# Altium PCB Sensor Bar 2.0 by GAO.PcbDoc (part 2 of 3)
Units mil, origin at the board's own origin, x right, y up, seen from the top; angles counter-clockwise.
Board outline 6710 x 1765 mil, 2 copper layers (Top Layer, Bottom Layer); 247 components, 162 nets, 624 pads, 280 vias.
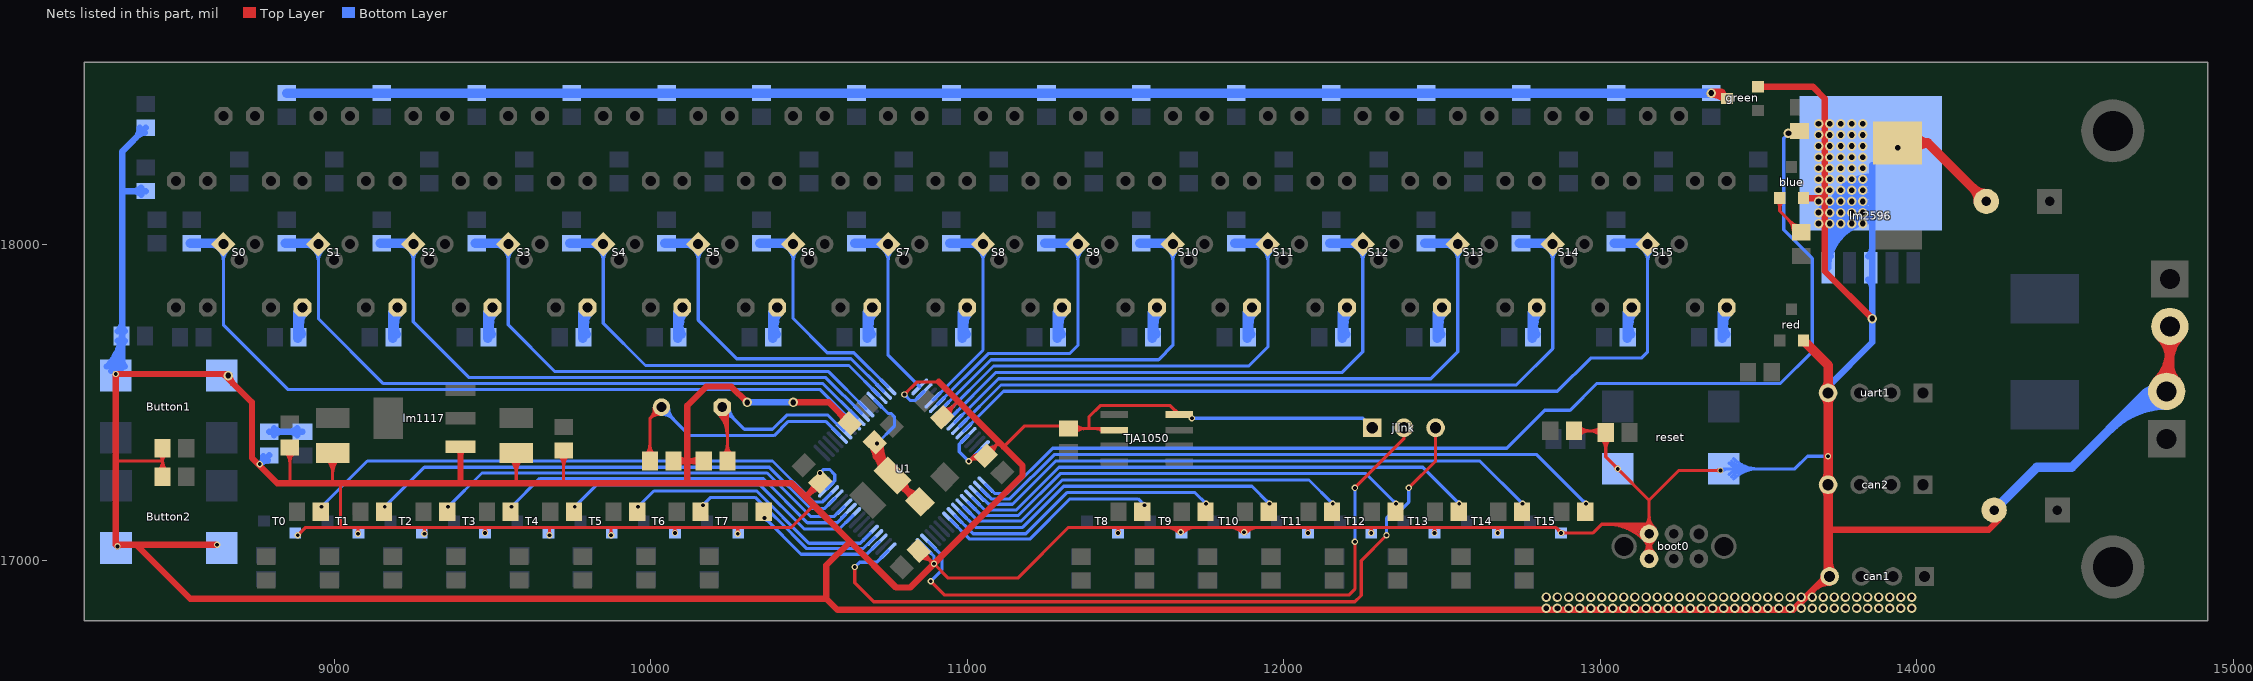
[diagram p2: the nets of this part, all layers, seen from the top]

## Via types
v1: diameter 30, hole 18, Top Layer to Bottom Layer, 141 vias
v2: diameter 20, hole 12, Top Layer to Bottom Layer, 139 vias

## Nets (pads, with @x,y where several pads share a name; then routed paths per layer and width w, separated by ;. In a path a pad name is that pad's centre, name@x,y a point inside that pad or via, vN(x,y) a via of type N, cw(c..) or ccw(c..) an arc to the next point about the centre after c; other vN are vias at no path point) (continued)
GND: blue.2 boot0.5 boot0.6 Button1.1 Button2.1 C1.2 C2.1 C3.2 C4.1 C5.1 C6.1 C7.1 C9.2 C10.2 C13.2 C14.1 C15.2 C16.1 C17.2 C18.2 C19.2 C20.2 C22.2 C23.2 can1.4 can2.4 green.2 jlink.1 lm1117.1 lm2596.0 lm2596.3 lm2596.5 power1.2 power2.2 R1.1 R2.1 R3.1 red.2 reset.1 schottky.2 T0.2 T1.2 T2.2 T3.2 T4.2 T5.2 T6.2 T7.2 T8.2 T9.2 T10.2 T11.2 T12.2 T13.2 T14.2 T15.2 TJA1050.2 TJA1050.8 U1.18 U1.28 U1.31 U1.47 U1.63 uart1.4 | length 33257.7
  Top Layer w10: 8310,17315 8457.6,17315 ; C10.2@8443.87,17284.28 ccw(c8416.37,17315) 8457.6,17315 ; C9.2@8447.13,17333.33 cw(c8436.31,17315) 8457.6,17315 ; C10.2@8457.6,17270 8457.6,17315 ; C9.2@8457.6,17360 C9.2@8457.6,17355 8457.6,17315 ; C9.2@8468.06,17333.33 ccw(c8478.88,17315) 8457.6,17315 ; C10.2@8471.33,17284.28 cw(c8498.82,17315) 8457.6,17315 ; C16.1@8845.44,17343.04 cw(c8810.29,17307.89) 8860,17307.89 cw(c8909.71,17307.89) C16.1@8874.56,17343.04 ; 8860,17250 C16.1@8860,17357.6 ; v2(8885,17080) 8910,17105 9020,17105 ; v2@8885,17085 ccw(c8885,17097.07) 8893.54,17088.54 ccw(c8902.07,17080) v2@8890,17080 ; C15.2@8976.26,17321.15 cw(c8931.03,17275.91) 8995,17275.91 cw(c9058.97,17275.91) C15.2@9013.74,17321.15 ; C15.2@8983.34,17328.22 cw(c8955.18,17300.06) 8995,17300.06 cw(c9034.82,17300.06) C15.2@9006.66,17328.22 ; 8995,17245 C15.2@8995,17339.88 ; 9020,17245 9020,17105 ; v2@9071.46,17088.54 ccw(c9062.93,17097.07) 9075,17097.07 ccw(c9087.07,17097.07) v2@9078.54,17088.54 ; v2(9075,17085) 9075,17105 ; v2@9281.46,17088.54 ccw(c9272.93,17097.07) 9285,17097.07 ccw(c9297.07,17097.07) v2@9288.54,17088.54 ; v2(9285,17085) 9285,17102.5 ; v2@9473.18,17091.13 ccw(c9464.65,17099.67) 9476.72,17099.67 ccw(c9488.79,17099.67) v2@9480.25,17091.13 ; v2(9476.72,17087.6) 9476.72,17103.28 ; C17.2@9556.26,17321.15 cw(c9511.03,17275.91) 9575,17275.91 cw(c9638.97,17275.91) C17.2@9593.74,17321.15 ; C17.2@9563.34,17328.22 cw(c9535.18,17300.06) 9575,17300.06 cw(c9614.82,17300.06) C17.2@9586.66,17328.22 ; 9575,17245 C17.2@9575,17339.88 ; v2@9676.46,17083.54 ccw(c9667.93,17092.07) 9680,17092.07 ccw(c9692.07,17092.07) v2@9683.54,17083.54 ; v2(9680,17080) 9680,17105 ; C14.1@9710.44,17333.04 cw(c9675.29,17297.89) 9725,17297.89 cw(c9774.71,17297.89) C14.1@9739.56,17333.04 ; 9725,17245 C14.1@9725,17347.6 ; v2@9871.46,17083.54 ccw(c9862.93,17092.07) 9875,17092.07 ccw(c9887.07,17092.07) v2@9878.54,17083.54 ; v2(9875,17080) 9875,17100 ; v2@10073.18,17091.13 ccw(c10064.65,17099.67) 10076.72,17099.67 ccw(c10088.79,17099.67) v2@10080.25,17091.13 ; v2(10076.72,17087.6) 10076.72,17103.28 ; v2@10271.46,17088.54 ccw(c10262.93,17097.07) 10275,17097.07 ccw(c10287.07,17097.07) v2@10278.54,17088.54 ; v2(10275,17085) 10275,17105 ; 10488.95,17201.05 10492.89,17205 ; 10510,17170 10445,17105 10275,17105 ; v2(10801.63,17525) 10841.63,17565 10910,17565 ; v2@10801.63,17530 ccw(c10801.63,17542.07) 10810.17,17533.54 ccw(c10818.7,17525) v2@10806.63,17525 ; C4.1@10846.45,17031.45 10853.55,17031.45 v2(10895,16990) ; C4.1@10849.5,17018.08 cw(c10850.5,16978.46) 10878.52,17006.48 ; C4.1@10849.75,17008.08 cw(c10851.31,16946.31) v2(10895,16990) ; C4.1@10869.82,17028.66 ccw(c10902.38,17028.66) 10879.36,17005.64 ; v2@10890,16990 ccw(c10877.93,16990) 10886.46,16998.54 ccw(c10895,17007.07) v2@10895,16995 ; v2@10890.17,16988.71 ccw(c10878.51,16985.58) 10884.54,16996.04 ccw(c10890.58,17006.49) v2@10893.71,16994.83 ; C7.1@10921.45,17453.55 10967.5,17499.61 ; C7.1@10924.23,17476.93 ccw(c10924.23,17526.64) 10959.38,17491.49 ccw(c10994.53,17456.34) C7.1@10944.82,17456.34 ; v2@11005,17319.05 ccw(c11005,17331.12) 11013.54,17322.58 ccw(c11022.07,17314.05) v2@11010,17314.05 ; v2@11006.29,17318.88 ccw(c11009.42,17330.54) 11015.45,17320.08 ccw(c11021.49,17309.63) 11009.83,17312.75 cw(c11030.04,17307.34) 11019.58,17325.46 ; v2@11009.95,17314.78 cw(c11016.89,17315.8) 11013.38,17321.88 ; 11012.08,17321.13 cw(c11030.2,17303.01) C6.1@11048.29,17321.16 ; 11019.17,17328.21 cw(c11037.27,17310.11) C6.1@11055.35,17328.24 ; C6.1@11041.23,17314.08 ccw(c11023.13,17295.92) v2(11005,17314.05) 11022.4,17331.45 C6.1@11058.55,17331.45 ; C6.1@11058.55,17333.55 C6.1@11058.55,17331.45 ; C6.1@11061.34,17354.82 ccw(c11061.34,17404.53) 11096.49,17369.38 ccw(c11131.64,17334.23) C6.1@11081.93,17334.23 ; 11100,17375 11100,17372.89 C6.1@11058.55,17331.45 ; 11115,17360 11180,17425 11290,17425 ccw(c11290,17437.05) C2.1@11299.62,17429.8 ; C2.1@11320,17417.4 11385,17417.4 ; C2.1@11338.5,17402.84 cw(c11373.65,17367.69) 11373.65,17417.4 cw(c11373.65,17467.11) C2.1@11338.5,17431.96 ; 11405.69,17417.4 cw(c11405.69,17384.89) TJA1050.2@11428.68,17407.88 ; TJA1050.2@11459.87,17417.4 11385,17417.4 ; v2@11473.18,17091.13 ccw(c11464.65,17099.67) 11476.72,17099.67 ccw(c11488.79,17099.67) v2@11480.25,17091.13 ; v2(11476.72,17087.6) 11476.72,17103.28 ; 11626.72,17105 cw(c11626.72,17041.72) v2@11671.46,17086.46 ; 11650.86,17105 cw(c11650.86,17065.86) 11678.54,17093.54 cw(c11687.07,17102.07) 11675,17102.07 cw(c11662.93,17102.07) 11671.46,17093.54 cw(c11699.14,17065.86) 11699.14,17105 ; TJA1050.8@11670,17462 11642,17490 11420,17490 11385,17455 11385,17417.4 ; v2(11675,17090) 11675,17105 ; v2@11678.54,17086.46 cw(c11723.28,17041.72) 11723.28,17105 ; 11826.72,17105 cw(c11826.72,17041.72) v2@11871.46,17086.46 ; 11850.86,17105 cw(c11850.86,17065.86) 11878.54,17093.54 cw(c11887.07,17102.07) 11875,17102.07 cw(c11862.93,17102.07) 11871.46,17093.54 cw(c11899.14,17065.86) 11899.14,17105 ; v2(11875,17090) 11875,17105 ; v2@11878.54,17086.46 cw(c11923.28,17041.72) 11923.28,17105 ; v2@12073.18,17091.13 ccw(c12064.65,17099.67) 12076.72,17099.67 ccw(c12088.79,17099.67) v2@12080.25,17091.13 ; v2(12076.72,17087.6) 12076.72,17101.72 ; v2@12273.18,17091.13 ccw(c12264.65,17099.67) 12276.72,17099.67 ccw(c12288.79,17099.67) v2@12280.25,17091.13 ; v2(12276.72,17087.6) 12276.72,17101.72 ; v2@12473.18,17091.13 ccw(c12464.65,17099.67) 12476.72,17099.67 ccw(c12488.79,17099.67) v2@12480.25,17091.13 ; v2(12476.72,17087.6) 12476.72,17103.28 ; v2@12673.18,17091.13 ccw(c12664.65,17099.67) 12676.72,17099.67 ccw(c12688.79,17099.67) v2@12680.25,17091.13 ; v2(12676.72,17087.6) 12676.72,17103.28 ; v2@12871.72,17087.6 ccw(c12859.65,17087.6) 12868.18,17096.13 ccw(c12876.72,17104.67) v2@12876.72,17092.6 ; v2@12880.25,17084.06 cw(c12888.79,17075.53) 12888.79,17087.6 cw(c12888.79,17099.67) v2@12880.25,17091.13 ; R3.1@12917.4,17410 C13.2@13012.6,17410 ; R3.1@12931.96,17395.44 cw(c12967.11,17360.29) 12967.11,17410 cw(c12967.11,17459.71) R3.1@12931.96,17424.56 ; 12965.32,17410 cw(c12965.32,17356.66) C13.2@13003.04,17394.38 ; 12970.45,17410 ccw(c12970.45,17456.08) C13.2@13003.04,17423.5 ; 12989.46,17410 cw(c12989.46,17380.8) C13.2@13010.11,17401.45 ; C13.2@13003.04,17386.5 cw(c12967.89,17351.35) 13017.6,17351.35 cw(c13067.31,17351.35) C13.2@13032.16,17386.5 ; C13.2@13017.6,17405 13017.6,17327.76 v2(13055.35,17290) 13154.41,17190.95 ; 13021.25,17115 cw(c13021.25,16951.21) 13137.07,17067.03 cw(c13095.19,17025.16) 13154.41,17025.16 cw(c13213.62,17025.16) boot0.6@13171.75,17067.03 ; 13045.39,17115 cw(c13045.39,16975.35) 13144.14,17074.1 cw(c13119.34,17049.3) 13154.41,17049.3 cw(c13189.48,17049.3) boot0.6@13164.68,17074.1 ; v2@13050.35,17290 ccw(c13038.28,17290) 13046.82,17298.54 ccw(c13055.35,17307.07) v2@13055.35,17295 ; v2@13055.35,17285 cw(c13055.35,17272.93) 13063.89,17281.46 cw(c13072.43,17290) v2@13060.35,17290 ; 13069.53,17115 cw(c13069.53,16999.49) boot0.6@13151.21,17081.17 ; 13093.67,17115 cw(c13093.67,17023.63) boot0.6@13158.28,17088.24 ; 13117.82,17115 cw(c13117.82,17047.78) boot0.6@13165.35,17095.31 ; boot0.5@13137.07,17022.97 ccw(c13095.19,17064.84) 13154.41,17064.84 ccw(c13213.62,17064.84) boot0.5@13171.75,17022.97 ; boot0.6@13137.07,17101.71 ccw(c13095.19,17143.58) 13154.41,17143.58 ccw(c13213.62,17143.58) boot0.6@13171.75,17101.71 ; boot0.6@13141.03,17063.81 cw(c13131.03,17048.44) 13148.74,17043.69 cw(c13175.65,17036.48) boot0.6@13164.35,17061.95 ; 13141.96,17115 cw(c13141.96,17071.92) boot0.6@13172.42,17102.38 ; boot0.5@13144.14,17015.9 ccw(c13119.34,17040.7) 13154.41,17040.7 ccw(c13189.48,17040.7) boot0.5@13164.68,17015.9 ; boot0.6@13144.14,17094.64 ccw(c13119.34,17119.44) 13154.41,17119.44 ccw(c13189.48,17119.44) boot0.6@13164.68,17094.64 ; boot0.6@13144.46,17061.95 cw(c13133.17,17036.48) 13160.08,17043.69 cw(c13177.79,17048.44) boot0.6@13167.79,17063.81 ; 13150,17115 13005,17115 12977.6,17087.6 v2(12876.72,17087.6) 12859.31,17105 11875,17105 ; boot0.5@13154.41,17005.63 boot0.6@13154.41,17084.37 13154.41,17190.95 ; v2@13376.46,17281.46 ccw(c13367.93,17272.93) 13367.93,17285 ccw(c13367.93,17297.07) v2@13376.46,17288.54 ; v2(13380,17285) 13248.46,17285 13154.41,17190.95 ; 9020,17105 9075,17105 ; 9075,17105 9680,17105 ; 9680,17105 10275,17105 ; v2(10895,16990) 10940,16945 11160,16945 11320,17105 11675,17105 ; 11675,17105 11875,17105
  Top Layer w20: 8310,17057.07 ccw(c8327.07,17057.07) v2(8315,17045) cw(c8327.07,17032.93) 8327.07,17050 ; v2@8625,17050 8375,17050 ; 8640.86,17590 cw(c8640.86,17560.86) v1@8661.46,17581.46 ; v1@8660.38,17583.08 ccw(c8650,17578.75) 8650,17590 ; v1@8670,17585 ccw(c8706.21,17585) 8680.61,17559.39 ; lm1117.1@9392.32,17352.6 cw(c9375.79,17336.07) 9399.17,17336.07 cw(c9422.55,17336.07) lm1117.1@9406.02,17352.6 ; lm1117.1@9399.17,17359.45 9399.17,17245 ; C1.2@10072.4,17315 10115,17315 ; C1.2@10083.43,17303.98 cw(c10110.04,17277.36) 10110.04,17315 cw(c10110.04,17352.64) C1.2@10083.43,17326.02 ; C3.2@10156.57,17303.98 ccw(c10129.96,17277.36) 10129.96,17315 ccw(c10129.96,17352.64) C3.2@10156.57,17326.02 ; C3.2@10167.6,17315 10115,17315 ; v1(10305,17500) 10255,17550 10175,17550 10115,17490 10115,17315 ; v1@10445,17500 v1(10450,17500) 10562.11,17500 R2.1@10628.55,17433.55 ; 10492.89,17205 C5.1@10536.45,17248.55 ; C5.1@10518.07,17245.77 cw(c10480.43,17245.77) 10507.05,17219.15 cw(c10533.66,17192.54) C5.1@10533.66,17230.18 ; R2.1@10610.18,17436.34 ccw(c10572.54,17436.34) 10599.15,17462.95 ccw(c10625.77,17489.57) R2.1@10625.77,17451.93 ; 10910,17565 11100,17375 11115,17360 11175,17300 11175,17270 v2(10895,16990) 10820,16915 10775,16915 10630,17060 ; green.2@13499.21,18497.4 13672.6,18497.4 13710,18460 13710,18310 13710,18240 13710,18145 ; green.2@13505.65,18491.95 cw(c13518.83,18478.77) 13518.83,18497.4 cw(c13518.83,18516.03) green.2@13505.65,18502.86 ; blue.2@13643.19,18145 13710,18145 ; blue.2@13647.86,18139.35 cw(c13661.51,18125.7) 13661.51,18145 ; blue.2@13647.86,18150.26 ccw(c13660.56,18162.96) 13660.56,18145 ; 13674.59,16909.59 cw(c13725,16859.19) can1.4@13725,16930.47 ; 13698.74,16933.74 ccw(c13682.47,16950) can1.4@13705.47,16950 ; can1.4@13720,16955 13625,16860 13610,16845 13600,16845 13390,16845 13285,16845 10590,16845 10555,16880 ; 13720,17097.5 14227.5,17097.5 C19.2@14260,17130 ; v1(13860,17765) 13710,17915 13710,18145 ; 8375,17050 8545,16880 10555,16880 ; 8375,17050 8310,17050 8310,17315 v2(8310,17590) 8650,17590 ; 8650,17590 8740,17500 8740,17325 8820,17245 8995,17245 9020,17245 9399.17,17245 ; 9399.17,17245 9575,17245 9725,17245 10115,17245 ; 10115,17245 10115,17315 ; 10115,17245 10445,17245 10488.95,17201.05 10630,17060 ; 10555,16880 10555,16985 10630,17060
  Top Layer w30: red.2@13642.4,17695.79 13720,17618.19 uart1.4@13720,17530 can2.4@13720,17240 13720,17097.5 can1.4@13720,16955 ; can2.4@13709.73,17229.73 cw(c13684.93,17204.93) 13720,17204.93 cw(c13755.07,17204.93) can2.4@13730.27,17229.73 ; can2.4@13709.73,17250.27 ccw(c13684.93,17275.07) 13720,17275.07 ccw(c13755.07,17275.07) can2.4@13730.27,17250.27 ; uart1.4@13709.73,17519.73 cw(c13684.93,17494.93) 13720,17494.93 cw(c13755.07,17494.93) uart1.4@13730.27,17519.73 ; uart1.4@13709.73,17540.27 ccw(c13684.93,17565.07) 13720,17565.07 ccw(c13755.07,17565.07) uart1.4@13730.27,17540.27 ; 13720,16997.14 ccw(c13772.14,16997.14) can1.4@13735.27,16960.27 ; v1(13940,18305) cw(c13976.21,18268.79) schottky.2@13976.21,18320 ; schottky.2@13940,18320 14035,18320 ; schottky.2@13996.95,18296.5 cw(c14035,18277.45) 14035,18320 ; schottky.2@13996.95,18343.5 ccw(c14035,18362.55) 14035,18320 ; C18.2@14195,18135 ccw(c14134.64,18135) 14177.32,18177.68 ccw(c14220,18220.36) C18.2@14220,18160 ; C18.2@14220,18135 14035,18320 ; power2.2@14758.85,17566.15 ccw(c14659.5,17665.5) 14800,17665.5 ; power1.2@14768.85,17708.85 cw(c14693.64,17633.64) 14800,17633.64 cw(c14906.36,17633.64) power1.2@14831.15,17708.85 ; power2.2@14800,17530 power1.2@14800,17740 ; 14800,17617.22 ccw(c14872.22,17617.22) power2.2@14821.15,17566.15
  Bottom Layer w10: v2(10535,17276.61) 10546.76,17288.37 10565,17288.37 10581.57,17271.8 10581.57,17252.52 U1.63@10555.02,17225.97 ; v2@10535,17281.61 ccw(c10535,17293.68) 10543.54,17285.15 ccw(c10552.07,17276.61) v2@10540,17276.61 ; v2@10801.63,17520 cw(c10801.63,17507.93) 10810.17,17516.46 cw(c10818.7,17525) v2@10806.63,17525 ; v2(10801.63,17525) 10821.07,17505.56 10834.6,17505.56 U1.18@10864.03,17534.98 ; U1.47@10864.03,17045.02 10895,17014.05 v2(10895,16990) ; v2@10891.46,16993.54 ccw(c10882.93,17002.07) 10895,17002.07 ccw(c10907.07,17002.07) v2@10898.54,16993.54 ; v2@11000,17314.05 ccw(c10987.93,17314.05) 10996.46,17322.58 ccw(c11005,17331.12) 11005,17319.05 ccw(c11005,17331.12) 11013.54,17322.58 ccw(c11022.07,17314.05) v2@11010,17314.05 ; U1.28@11003.22,17395.79 10975,17367.56 10975,17344.05 v2(11005,17314.05) U1.31@11044.98,17354.03 ; v2(11710,17450) 12250,17450 jlink.1@12280,17420 ; reset.1@13383.54,17281.46 cw(c13404.14,17260.86) reset.1@13404.14,17290 ; reset.1@13390,17290 13615,17290 13655,17330 v2(13720,17330) ; reset.1@13407.68,17272.32 cw(c13450.36,17229.64) 13450.36,17290 cw(c13450.36,17350.36) reset.1@13407.68,17307.68 ; reset.1@13414.75,17265.25 cw(c13474.5,17205.5) 13474.5,17290 cw(c13474.5,17374.5) reset.1@13414.75,17314.75 ; reset.1@13421.82,17258.18 cw(c13498.64,17181.36) 13498.64,17290 cw(c13498.64,17398.64) reset.1@13421.82,17321.82 ; v2@13716.46,17326.46 ccw(c13707.93,17317.93) 13707.93,17330 ccw(c13707.93,17342.07) v2@13716.46,17333.54
  Bottom Layer w20: Button1.1@8281.72,17613.28 ccw(c8165.15,17729.85) C23.2@8330,17729.85 ; Button1.1@8295.86,17599.14 ccw(c8213.43,17681.57) C23.2@8330,17681.57 ; Button1.1@8310,17585 ccw(c8261.72,17633.28) 8330,17633.28 ccw(c8358.28,17633.28) Button1.1@8338.28,17613.28 ; v2(8310,17590) 8330,17610 8330,18292.6 C20.2@8405,18367.6 ; C23.2@8316.57,17695.04 cw(c8284.16,17662.63) 8330,17662.63 ; C23.2@8316.57,17724.96 ccw(c8284.16,17757.37) 8330,17757.37 ; 8330,17674.22 cw(c8359.44,17674.22) C23.2@8338.62,17695.04 ; 8330,17745.78 ccw(c8359.44,17745.78) C23.2@8338.62,17724.96 ; 8332.6,18167.6 C22.2@8405,18167.6 ; 8371.66,18334.26 ccw(c8338.33,18367.6) C20.2@8385.47,18367.6 ; C20.2@8381.17,18343.77 cw(c8401.06,18323.87) C20.2@8401.06,18352.01 ; C22.2@8390.04,18156.57 ccw(c8363.42,18129.96) 8363.42,18167.6 ccw(c8363.42,18205.24) C22.2@8390.04,18178.62 ; v2(8765,17305) v2@8767.4,17305 ; R1.1@8771.17,17308.77 cw(c8791.06,17288.87) R1.1@8791.06,17317.01 ; R1.1@8775.65,17330.22 cw(c8746.65,17325.75) v2@8767.4,17305 ; R1.1@8795,17332.6 v2@8767.4,17305 ; v1(10305,17500) v1(10450,17500) ; lm2596.0@13699.31,18111.81 cw(c13646.95,18059.45) lm2596.0@13721,18059.45 ; lm2596.5@13713.22,17961.78 ccw(c13694.44,17980.56) 13721,17980.56 ccw(c13747.56,17980.56) lm2596.5@13728.78,17961.78 ; uart1.4@13720,17550 13860,17690 v1(13860,17765) lm2596.0@13860,18250 ; lm2596.5@13721,17925 lm2596.0@13721,18121 ; lm2596.5@13721,17925.06 cw(c13869.54,17925.06) lm2596.0@13857.41,18073.11 ; lm2596.5@13721,17946.77 cw(c13867.77,17946.77) lm2596.0@13855.78,18093.04 ; lm2596.5@13721,17968.47 cw(c13865.99,17968.47) lm2596.0@13854.14,18112.98 ; 13721,17990.18 cw(c13864.21,17990.18) lm2596.0@13852.51,18132.91 ; 13721,18011.89 cw(c13862.43,18011.89) lm2596.0@13850.87,18152.84 ; 13721,18033.59 cw(c13860.65,18033.59) lm2596.0@13849.24,18172.78 ; lm2596.0@13721,18055.3 cw(c13858.87,18055.3) lm2596.0@13847.61,18192.71 ; lm2596.0@13721,18077.01 cw(c13857.09,18077.01) lm2596.0@13845.97,18212.64 ; lm2596.3@13847.22,17888.22 cw(c13816.37,17857.37) 13860,17857.37 ; lm2596.3@13847.22,17961.78 ccw(c13816.37,17992.63) 13860,17992.63
  Bottom Layer w30: C19.2@14245,17160 14380,17295 14490,17295 14725,17530 ; 14612.37,17417.37 cw(c14790,17239.73) power2.2@14790,17490.94 ; 14663.58,17468.58 cw(c14790,17342.16) power2.2@14790,17520.94 ; 14714.79,17519.79 cw(c14790,17444.59) power2.2@14790,17550.94 ; power2.2@14747.63,17547.08 cw(c14725,17553.53) 14725,17530 ; power2.2@14751.1,17514.32 ccw(c14725,17500.44) 14725,17530 ; power2.2@14800,17530 14725,17530
  other v1: 12830,16850 12865,16850 12900,16850 12935,16850 12970,16850 13005,16850 13040,16850 13075,16850 13110,16850 13145,16850 13180,16850 13215,16850 13250,16850 13285,16850 13320,16850 13355,16850 13390,16850 13425,16850 13460,16850 13495,16850 13530,16850 13565,16850 13600,16850 13635,16850 13670,16850 13705,16850 13740,16850 13775,16850 13810,16850 13845,16850 13880,16850 13915,16850 13950,16850 13985,16850 12830,16885 12865,16885 12900,16885 12935,16885 12970,16885 13005,16885 13040,16885 13075,16885 13110,16885 13145,16885 13180,16885 13215,16885 13250,16885 13285,16885 13320,16885 13355,16885 13390,16885 13425,16885 13460,16885 13495,16885 13530,16885 13565,16885 13600,16885 13635,16885 13670,16885 13705,16885 13740,16885 13775,16885 13810,16885 13845,16885 13880,16885 13915,16885 13950,16885 13985,16885 8665,17585 13690,18065 13725,18065 13760,18065 13795,18065 13830,18065 13690,18100 13725,18100 13760,18100 13795,18100 13830,18100 13690,18135 13725,18135 13760,18135 13795,18135 13830,18135 13690,18170 13725,18170 13760,18170 13795,18170 13830,18170 13690,18205 13725,18205 13760,18205 13795,18205 13830,18205 13690,18240 13725,18240 13760,18240 13795,18240 13830,18240 13690,18275 13725,18275 13760,18275 13795,18275 13830,18275 13690,18310 13725,18310 13760,18310 13795,18310 13830,18310 13690,18345 13725,18345 13760,18345 13795,18345 13830,18345 13690,18380 13725,18380 13760,18380 13795,18380 13830,18380
  other v2: 8630,17050
GREEN: R36.1 U1.33 | length 3541.7
  Bottom Layer w10: U1.33@11058.9,17239.89 11086.79,17212 11127,17212 11270,17355 12705,17355 12825,17475 12905,17475 12990,17560 13570,17560 13670,17660 13670,17955 13580,18045 13580,18335 v1(13595,18350)
GREENGND: green.3 R20.1 R21.1 R22.1 R23.1 R24.1 R25.1 R26.1 R27.1 R29.1 R30.1 R31.1 R32.1 R33.1 R34.1 R35.1 R37.1 | length 4584.8
  Top Layer w30: v1(13350.79,18477.4) green.3@13383.38,18477.4 ; v1@13351.23,18477.4 cw(c13351.23,18411.42) green.3@13397.88,18458.08
  Bottom Layer w30: R37.1@8850.39,18477.4 R29.1@9150.39,18477.4 R30.1@9450.39,18477.4 R31.1@9750.39,18477.4 R32.1@10050.39,18477.4 R33.1@10350.39,18477.4 R34.1@10650.39,18477.4 R35.1@10950.39,18477.4 R20.1@11250.39,18477.4 R21.1@11550.39,18477.4 R22.1@11850.39,18477.4 R23.1@12150.39,18477.4 R24.1@12450.39,18477.4 v1(13350.79,18477.4)
IN0: R56.2 S0.1 U1.8 | length 2632.2
  Bottom Layer w10: S0.1@8634.05,17984.05 cw(c8595.54,17945.54) 8650,17945.54 cw(c8704.46,17945.54) S0.1@8665.95,17984.05 ; S0.1@8641.12,17991.12 cw(c8619.68,17969.68) 8650,17969.68 cw(c8680.32,17969.68) S0.1@8658.88,17991.12 ; S0.1@8650,18000 8650,17745 8854.46,17540.54 10535.54,17540.54 U1.8@10638.53,17437.55
  Bottom Layer w30: R56.2@8545,18002.6 R56.2@8550,18002.6 S0.1@8642.4,18002.6 ; 8613.41,18002.6 cw(c8613.41,17963.41) S0.1@8641.12,17991.12
IN1: R57.2 S1.1 U1.9 | length 2328.7
  Bottom Layer w10: S1.1@8934.05,17984.05 cw(c8895.54,17945.54) 8950,17945.54 cw(c9004.46,17945.54) S1.1@8965.95,17984.05 ; S1.1@8941.12,17991.12 cw(c8919.68,17969.68) 8950,17969.68 cw(c8980.32,17969.68) S1.1@8958.88,17991.12 ; S1.1@8950,18000 8950,17765 9155.54,17559.46 10544.46,17559.46 U1.9@10652.45,17451.47
  Bottom Layer w30: R57.2@8845,18002.6 R57.2@8850,18002.6 S1.1@8942.4,18002.6 ; 8913.41,18002.6 cw(c8913.41,17963.41) S1.1@8941.12,17991.12
IN2: R58.2 S2.1 U1.10 | length 2042.7
  Bottom Layer w10: S2.1@9234.05,17984.05 cw(c9195.54,17945.54) 9250,17945.54 cw(c9304.46,17945.54) S2.1@9265.95,17984.05 ; S2.1@9241.12,17991.12 cw(c9219.68,17969.68) 9250,17969.68 cw(c9280.32,17969.68) S2.1@9258.88,17991.12 ; S2.1@9250,18000 9250,17755 9426.62,17578.38 10553.38,17578.38 U1.10@10666.37,17465.38
  Bottom Layer w30: R58.2@9145,18002.6 R58.2@9150,18002.6 S2.1@9242.4,18002.6 ; 9213.41,18002.6 cw(c9213.41,17963.41) S2.1@9241.12,17991.12
IN3: R59.2 S3.1 U1.11 | length 1756.7
  Bottom Layer w10: S3.1@9534.05,17984.05 cw(c9495.54,17945.54) 9550,17945.54 cw(c9604.46,17945.54) S3.1@9565.95,17984.05 ; S3.1@9541.12,17991.12 cw(c9519.68,17969.68) 9550,17969.68 cw(c9580.32,17969.68) S3.1@9558.88,17991.12 ; S3.1@9550,18000 9550,17745 9697.7,17597.3 10562.3,17597.3 U1.11@10680.29,17479.3
  Bottom Layer w30: R59.2@9445,18002.6 R59.2@9450,18002.6 S3.1@9542.4,18002.6 ; 9513.41,18002.6 cw(c9513.41,17963.41) S3.1@9541.12,17991.12
IN4: R60.2 S4.1 U1.14 | length 1478.2
  Bottom Layer w10: S4.1@9834.05,17984.05 cw(c9795.54,17945.54) 9850,17945.54 cw(c9904.46,17945.54) S4.1@9865.95,17984.05 ; S4.1@9841.12,17991.12 cw(c9819.68,17969.68) 9850,17969.68 cw(c9880.32,17969.68) S4.1@9858.88,17991.12 ; S4.1@9850,18000 9850,17750 9983.44,17616.56 10626.56,17616.56 U1.14@10722.05,17521.06
  Bottom Layer w30: R60.2@9745,18002.6 R60.2@9750,18002.6 S4.1@9842.4,18002.6 ; 9813.41,18002.6 cw(c9813.41,17963.41) S4.1@9841.12,17991.12
IN5: R61.2 S5.1 U1.15 | length 1180.5
  Bottom Layer w10: S5.1@10134.05,17984.05 cw(c10095.54,17945.54) 10150,17945.54 cw(c10204.46,17945.54) S5.1@10165.95,17984.05 ; S5.1@10141.12,17991.12 cw(c10119.68,17969.68) 10150,17969.68 cw(c10180.32,17969.68) S5.1@10158.88,17991.12 ; S5.1@10150,18000 10150,17760 10272.02,17637.98 10632.98,17637.98 U1.15@10735.97,17534.98
  Bottom Layer w30: R61.2@10045,18002.6 R61.2@10050,18002.6 S5.1@10142.4,18002.6 ; 10113.41,18002.6 cw(c10113.41,17963.41) S5.1@10141.12,17991.12
IN6: R62.2 S6.1 U1.16 | length 885.8
  Bottom Layer w10: S6.1@10434.05,17984.05 cw(c10395.54,17945.54) 10450,17945.54 cw(c10504.46,17945.54) S6.1@10465.95,17984.05 ; S6.1@10441.12,17991.12 cw(c10419.68,17969.68) 10450,17969.68 cw(c10480.32,17969.68) S6.1@10458.88,17991.12 ; S6.1@10450,18000 10450,17765 10558.1,17656.9 10641.9,17656.9 U1.16@10749.89,17548.9
  Bottom Layer w30: R62.2@10345,18002.6 R62.2@10350,18002.6 S6.1@10442.4,18002.6 ; 10413.41,18002.6 cw(c10413.41,17963.41) S6.1@10441.12,17991.12
IN7: R63.2 S7.1 U1.17 | length 753.9
  Bottom Layer w10: S7.1@10734.05,17984.05 cw(c10695.54,17945.54) 10750,17945.54 cw(c10804.46,17945.54) S7.1@10765.95,17984.05 ; S7.1@10741.12,17991.12 cw(c10719.68,17969.68) 10750,17969.68 cw(c10780.32,17969.68) S7.1@10758.88,17991.12 ; S7.1@10750,18000 10750,17649.01 U1.17@10850.11,17548.9
  Bottom Layer w30: R63.2@10645,18002.6 R63.2@10650,18002.6 S7.1@10742.4,18002.6 ; 10713.41,18002.6 cw(c10713.41,17963.41) S7.1@10741.12,17991.12
IN8: R64.2 S8.1 U1.20 | length 819.7
  Bottom Layer w10: U1.20@10891.87,17507.14 11050,17665.27 S8.1@11050,18000 ; S8.1@11034.05,17984.05 cw(c10995.54,17945.54) 11050,17945.54 cw(c11104.46,17945.54) S8.1@11065.95,17984.05 ; S8.1@11041.12,17991.12 cw(c11019.68,17969.68) 11050,17969.68 cw(c11080.32,17969.68) S8.1@11058.88,17991.12
  Bottom Layer w30: R64.2@10945,18002.6 R64.2@10950,18002.6 S8.1@11042.4,18002.6 ; 11013.41,18002.6 cw(c11013.41,17963.41) S8.1@11041.12,17991.12
IN9: R65.2 S9.1 U1.21 | length 1102.9
  Bottom Layer w10: U1.21@10905.79,17493.22 11067.56,17655 11325,17655 11350,17680 S9.1@11350,18000 ; S9.1@11334.05,17984.05 cw(c11295.54,17945.54) 11350,17945.54 cw(c11404.46,17945.54) S9.1@11365.95,17984.05 ; S9.1@11341.12,17991.12 cw(c11319.68,17969.68) 11350,17969.68 cw(c11380.32,17969.68) S9.1@11358.88,17991.12
  Bottom Layer w30: R65.2@11245,18002.6 R65.2@11250,18002.6 S9.1@11342.4,18002.6 ; 11313.41,18002.6 cw(c11313.41,17963.41) S9.1@11341.12,17991.12
IN10: R66.2 S10.1 U1.22 | length 1394.8
  Bottom Layer w10: U1.22@10919.71,17479.3 11075.4,17635 11605,17635 11650,17680 S10.1@11650,18000 ; S10.1@11634.05,17984.05 cw(c11595.54,17945.54) 11650,17945.54 cw(c11704.46,17945.54) S10.1@11665.95,17984.05 ; S10.1@11641.12,17991.12 cw(c11619.68,17969.68) 11650,17969.68 cw(c11680.32,17969.68) S10.1@11658.88,17991.12
  Bottom Layer w30: R66.2@11545,18002.6 R66.2@11550,18002.6 S10.1@11642.4,18002.6 ; 11613.41,18002.6 cw(c11613.41,17963.41) S10.1@11641.12,17991.12
IN11: R67.2 S11.1 U1.23 | length 1689.6
  Bottom Layer w10: U1.23@10933.63,17465.38 11083.24,17615 11890,17615 11950,17675 S11.1@11950,18000 ; S11.1@11934.05,17984.05 cw(c11895.54,17945.54) 11950,17945.54 cw(c12004.46,17945.54) S11.1@11965.95,17984.05 ; S11.1@11941.12,17991.12 cw(c11919.68,17969.68) 11950,17969.68 cw(c11980.32,17969.68) S11.1@11958.88,17991.12
  Bottom Layer w30: R67.2@11845,18002.6 R67.2@11850,18002.6 S11.1@11942.4,18002.6 ; 11913.41,18002.6 cw(c11913.41,17963.41) S11.1@11941.12,17991.12
IN12: R68.2 S12.1 U1.24 | length 1990.2
  Bottom Layer w10: U1.24@10947.55,17451.47 11091.08,17595 12185,17595 12250,17660 S12.1@12250,18000 ; S12.1@12234.05,17984.05 cw(c12195.54,17945.54) 12250,17945.54 cw(c12304.46,17945.54) S12.1@12265.95,17984.05 ; S12.1@12241.12,17991.12 cw(c12219.68,17969.68) 12250,17969.68 cw(c12280.32,17969.68) S12.1@12258.88,17991.12
  Bottom Layer w30: R68.2@12145,18002.6 R68.2@12150,18002.6 S12.1@12242.4,18002.6 ; 12213.41,18002.6 cw(c12213.41,17963.41) S12.1@12241.12,17991.12
IN13: R69.2 S13.1 U1.25 | length 2282
  Bottom Layer w10: U1.25@10961.47,17437.55 11098.92,17575 12465,17575 12550,17660 S13.1@12550,18000 ; S13.1@12534.05,17984.05 cw(c12495.54,17945.54) 12550,17945.54 cw(c12604.46,17945.54) S13.1@12565.95,17984.05 ; S13.1@12541.12,17991.12 cw(c12519.68,17969.68) 12550,17969.68 cw(c12580.32,17969.68) S13.1@12558.88,17991.12
  Bottom Layer w30: R69.2@12445,18002.6 R69.2@12450,18002.6 S13.1@12542.4,18002.6 ; 12513.41,18002.6 cw(c12513.41,17963.41) S13.1@12541.12,17991.12
IN14: R70.2 S14.1 U1.26 | length 2568
  Bottom Layer w10: U1.26@10975.38,17423.63 11106.76,17555 12735,17555 12850,17670 S14.1@12850,18000 ; S14.1@12834.05,17984.05 cw(c12795.54,17945.54) 12850,17945.54 cw(c12904.46,17945.54) S14.1@12865.95,17984.05 ; S14.1@12841.12,17991.12 cw(c12819.68,17969.68) 12850,17969.68 cw(c12880.32,17969.68) S14.1@12858.88,17991.12
  Bottom Layer w30: R70.2@12745,18002.6 R70.2@12750,18002.6 S14.1@12842.4,18002.6 ; 12813.41,18002.6 cw(c12813.41,17963.41) S14.1@12841.12,17991.12
IN15: R71.2 S15.1 U1.27 | length 2865.7
  Bottom Layer w10: U1.27@10989.3,17409.71 11114.6,17535 12865,17535 12970,17640 13130,17640 13150,17660 S15.1@13150,18000 ; S15.1@13134.05,17984.05 cw(c13095.54,17945.54) 13150,17945.54 cw(c13204.46,17945.54) S15.1@13165.95,17984.05 ; S15.1@13141.12,17991.12 cw(c13119.68,17969.68) 13150,17969.68 cw(c13180.32,17969.68) S15.1@13158.88,17991.12
  Bottom Layer w30: R71.2@13045,18002.6 R71.2@13050,18002.6 S15.1@13142.4,18002.6 ; 13113.41,18002.6 cw(c13113.41,17963.41) S15.1@13141.12,17991.12
JTCK: jlink.3 U1.49 | length 2448.2
  Top Layer w10: v2(10645,16980) 10645,16930 10705,16870 12225,16870 12245,16890 12245,17000 v2(12325,17080) ; v2(12395,17230) 12480,17315 jlink.3@12480,17420
  Bottom Layer w10: v2(10645,16980) 10660,16995 10713.79,16995 U1.49@10749.89,17031.1 ; v2(12325,17080) 12325,17135 12345,17155 12365,17155 12395,17185 v2(12395,17230)
JTMS: jlink.2 U1.46 | length 2101.1
  Top Layer w10: v2(10885,16935) 10928.98,16891.02 12206.02,16891.02 12225,16910 v2(12225,17060) v2@12225,17065 ; v2(12225,17230) 12380,17385 jlink.2@12380,17420
  Bottom Layer w10: U1.46@10877.95,17058.94 10920,17016.89 10920,16970 v2(10885,16935) ; v2(12225,17060) v2(12225,17230)
L0: R80.2 U1.62 | length 1753
  Bottom Layer w10: v2(8960,17170) 9105,17315 10385,17315 10515,17185 10541.89,17185 U1.62@10568.94,17212.05 ; v2@8960,17175 ccw(c8960,17187.07) 8968.54,17178.54 ccw(c8977.07,17170) v2@8965,17170
L1: R81.2 U1.61 | length 1561.2
  Bottom Layer w10: v2(9160,17170) 9285,17295 10375,17295 10505,17165 10549.73,17165 U1.61@10582.86,17198.13 ; v2@9160,17175 ccw(c9160,17187.07) 9168.54,17178.54 ccw(c9177.07,17170) v2@9165,17170
L2: R82.2 U1.59 | length 1383.3
  Bottom Layer w10: v2(9360,17170) 9467,17277 10368,17277 10505,17140 10530,17140 10580.4,17140 U1.59@10610.7,17170.29 ; v2@9360,17175 ccw(c9360,17187.07) 9368.54,17178.54 ccw(c9377.07,17170) v2@9365,17170
L3: R83.2 U1.58 | length 1179.6
  Bottom Layer w10: v2(9560,17170) 9650,17260 10355,17260 10495,17120 10590,17120 U1.58@10615,17145 ; v2@9560,17175 ccw(c9560,17187.07) 9568.54,17178.54 ccw(c9577.07,17170) v2@9565,17170
L4: R84.2 U1.57 | length 1002.1
  Bottom Layer w10: v2(9760,17170) 9830,17240 10345,17240 10485,17100 10596.08,17100 U1.57@10638.53,17142.45 ; v2@9760,17175 ccw(c9760,17187.07) 9768.54,17178.54 ccw(c9777.07,17170) v2@9765,17170
L5: R85.2 U1.53 | length 855.4
  Bottom Layer w10: v2(9960,17170) 10010,17220 10335,17220 10500,17055 10662.44,17055 U1.53@10694.21,17086.78 ; v2@9960,17175 ccw(c9960,17187.07) 9968.54,17178.54 ccw(c9977.07,17170) v2@9965,17170
L6: R86.2 U1.52 | length 654
  Bottom Layer w10: v2(10165,17175) 10190,17200 10330,17200 10395,17135 10395.96,17135 10492.96,17038 10670.76,17038 10705.62,17072.86 U1.52@10708.13,17072.86 ; v2@10165,17180 ccw(c10165,17192.07) 10173.54,17183.54 ccw(c10182.07,17175) v2@10170,17175
L7: R87.2 U1.51 | length 444.8
  Bottom Layer w10: v2@10360,17130 cw(c10360,17117.93) 10368.54,17126.46 cw(c10377.07,17135) v2@10365,17135 ; v2(10360,17135) 10475,17020 10683.11,17020 U1.51@10722.05,17058.94
L8: R96.2 U1.41 | length 717.4
  Bottom Layer w10: U1.41@10947.55,17128.53 11008.08,17068 11198,17068 11325,17195 11540,17195 v2(11560,17175) ; v2@11555,17175 ccw(c11542.93,17175) 11551.46,17183.54 ccw(c11560,17192.07) v2@11560,17180
L9: R97.2 U1.40 | length 904.6
  Bottom Layer w10: U1.40@10961.47,17142.45 11018.92,17085 11185,17085 11315,17215 11720,17215 v2(11755,17180) ; v2@11750,17180 ccw(c11737.93,17180) 11746.46,17188.54 ccw(c11755,17197.07) v2@11755,17185
L10: R98.2 U1.39 | length 1096.5
  Bottom Layer w10: U1.39@10975.38,17156.37 11026.76,17105 11175,17105 11305,17235 11900,17235 v2(11955,17180) ; v2@11950,17180 ccw(c11937.93,17180) 11946.46,17188.54 ccw(c11955,17197.07) v2@11955,17185
L11: R99.2 U1.38 | length 1288.3
  Bottom Layer w10: U1.38@10989.3,17170.29 11034.6,17125 11170,17125 11300,17255 12080,17255 v2(12155,17180) ; v2@12150,17180 ccw(c12137.93,17180) 12146.46,17188.54 ccw(c12155,17197.07) v2@12155,17185
L12: R100.2 U1.37 | length 1481.8
  Bottom Layer w10: U1.37@11003.22,17184.21 11044.44,17143 11162.04,17143 11294.04,17275 12260,17275 v2(12355,17180) ; v2@12350,17180 ccw(c12337.93,17180) 12346.46,17188.54 ccw(c12355,17197.07) v2@12355,17185
L13: R101.2 U1.36 | length 1676.2
  Bottom Layer w10: U1.36@11017.14,17198.13 11055.27,17160 11155,17160 11290,17295 12440,17295 v2(12555,17180) ; v2@12550,17180 ccw(c12537.93,17180) 12546.46,17188.54 ccw(c12555,17197.07) v2@12555,17185
L14: R102.2 U1.35 | length 1869.7
  Bottom Layer w10: U1.35@11031.06,17212.05 11033.58,17212.05 11067.63,17178 11143,17178 11280,17315 12620,17315 v2(12755,17180) ; v2@12750,17180 ccw(c12737.93,17180) 12746.46,17188.54 ccw(c12755,17197.07) v2@12755,17185
L15: R103.2 U1.34 | length 2064
  Bottom Layer w10: U1.34@11044.98,17225.97 11075.95,17195 11135,17195 11275,17335 12800,17335 v2(12955,17180) ; v2@12950,17180 ccw(c12937.93,17180) 12946.46,17188.54 ccw(c12955,17197.07) v2@12955,17185
Net1_2: 1.2 R1.2 | length 223.2
  Bottom Layer w20: R1.2@8795,17407.4 1.2@8900,17407.4 ; R1.2@8809.96,17396.38 cw(c8836.58,17369.76) 8836.58,17407.4 cw(c8836.58,17445.04) R1.2@8809.96,17418.43 ; 1.2@8883.07,17396.38 ccw(c8856.46,17369.77) 8856.46,17407.4 ccw(c8856.45,17445.04) 1.2@8883.07,17418.43
Netblue_1: blue.1 R38.2 | length 290.2
  Top Layer w10: blue.1@13558.61,18135.81 cw(c13536.9,18114.1) 13567.6,18114.1 cw(c13598.3,18114.1) blue.1@13576.59,18135.81 ; blue.1@13567.6,18145.79 13567.6,18104.8 R38.2@13635,18037.4 ; 13593.13,18079.27 cw(c13551.26,18037.4) R38.2@13610.47,18037.4 ; 13602.63,18069.77 ccw(c13631.06,18098.2) R38.2@13631.06,18057.99 ; R38.2@13610.2,18062.2 cw(c13585.4,18037.4) R38.2@13620.47,18037.4
NetC1_1: C1.1 U1.5 X1.2 | length 1155.2
  Top Layer w10: C1.1@9983.04,17333.5 ccw(c9947.89,17368.65) 9997.6,17368.65 ccw(c10047.31,17368.65) C1.1@10012.16,17333.5 ; C1.1@9997.6,17315 9997.6,17448.72 X1.2@10033.94,17485.06 ; X1.2@10011.4,17484.12 cw(c9964.19,17482.14) 9997.6,17448.73 cw(c10031.01,17415.31) X1.2@10032.99,17462.52 ; X1.2@10021.39,17484.54 cw(c9995.11,17483.43) 10013.71,17464.83 cw(c10032.31,17446.23) X1.2@10033.41,17472.52
  Bottom Layer w10: X1.2@10033.94,17462.5 cw(c10033.94,17408.04) 10072.45,17446.55 cw(c10110.96,17485.06) X1.2@10056.5,17485.06 ; X1.2@10033.94,17472.5 cw(c10033.94,17442.18) 10055.38,17463.62 cw(c10076.82,17485.06) X1.2@10046.5,17485.06 ; X1.2@10033.94,17485.06 10124,17395 10390,17395 10435,17440 10552.56,17440 U1.5@10596.78,17395.79
NetC3_1: C3.1 U1.6 X1.1 | length 1044.1
  Top Layer w10: X1.1@10210.11,17469.11 cw(c10132.16,17391.16) 10242.4,17391.16 ; X1.1@10217.18,17476.18 cw(c10156.3,17415.3) 10242.4,17415.3 ; X1.1@10224.25,17483.25 cw(c10180.44,17439.44) 10242.4,17439.44 ; X1.1@10226.06,17485.06 10242.4,17468.73 C3.1@10242.4,17315 ; C3.1@10227.84,17333.5 ccw(c10192.69,17368.65) 10242.4,17368.65 ccw(c10292.11,17368.65) C3.1@10256.96,17333.5
  Bottom Layer w10: X1.1@10226.06,17462.5 cw(c10226.06,17408.04) 10264.57,17446.55 cw(c10303.08,17485.06) X1.1@10248.62,17485.06 ; X1.1@10226.06,17472.5 cw(c10226.06,17442.18) 10247.5,17463.62 cw(c10268.94,17485.06) X1.1@10238.62,17485.06 ; X1.1@10226.06,17485.06 10296.13,17415 10385,17415 10430,17460 10560.4,17460 U1.6@10610.7,17409.71
NetC11_2: C11.2 C12.2 L1.1 U1.13 | length 1193.3
  Top Layer w15: C11.2@10698.55,17357.98 cw(c10674.38,17333.82) 10708.55,17333.82 ; C11.2@10699.43,17370.77 ccw(c10779.45,17370.77) 10722.86,17314.19 ; 10708.55,17328.41 cw(c10743.88,17328.41) C11.2@10722.36,17356.42 ; C11.2@10708.55,17348.4 cw(c10736.6,17348.4) C11.2@10716.77,17368.23 ; C11.2@10708.55,17373.55 10708.55,17328.5 ; C11.2@10714.43,17370.77 ccw(c10830.66,17370.77) L1.1@10748.47,17288.58 ; 10714.7,17322.35 ccw(c10748.66,17356.31) L1.1@10748.66,17308.28 ; L1.1@10724.71,17285.78 ccw(c10669.29,17289.23) 10708.56,17328.5 ; C11.2@10729.43,17370.77 ccw(c10881.87,17370.77) L1.1@10774.08,17262.97 ; L1.1@10779.29,17229.67 cw(c10779.29,17161.83) C12.2@10827.25,17209.8 ; L1.1@10793,17229.57 cw(c10760.36,17173.03) C12.2@10824.62,17184.57 ; L1.1@10803.28,17253.66 ccw(c10851.31,17253.66) 10817.35,17219.7 ; 10817.98,17215.15 ccw(c10833.83,17242.61) C12.2@10842.03,17211.99 ; 10820.98,17213.42 cw(c10801.97,17180.5) C12.2@10839.39,17187.22 ; C12.2@10824.25,17188.81 ccw(c10766.31,17188.81) 10807.28,17229.77 ccw(c10848.24,17270.74) C12.2@10848.24,17212.81 ; C12.2@10851.03,17186.03 10708.55,17328.5
  Bottom Layer w10: U1.13@10708.13,17507.14 10750.27,17465 10760,17465 10770,17455 10770,17425 v2(10715,17370) ; v2@10715,17375 ccw(c10715,17387.07) 10723.54,17378.54 ccw(c10732.07,17370) v2@10720,17370
NetD1_2: D1.2 R4.2 | length 215.7
  Bottom Layer w30: R4.2@8885,17702.99 D1.2@8885,17785 ; R4.2@8885,17732.4 cw(c8967.6,17732.4) D1.2@8909.19,17790.81 ; 8885,17740.7 ccw(c8918.77,17740.7) R4.2@8894.89,17716.82 ; 8891.19,17755.51 ccw(c8943.23,17741.57) R4.2@8896.57,17714.63
NetD2_2: D2.2 R5.2 | length 215.7
  Bottom Layer w30: R5.2@9185,17702.99 D2.2@9185,17785 ; R5.2@9185,17732.4 cw(c9267.6,17732.4) D2.2@9209.19,17790.81 ; 9185,17740.7 ccw(c9218.77,17740.7) R5.2@9194.89,17716.82 ; 9191.19,17755.51 ccw(c9243.23,17741.57) R5.2@9196.57,17714.63
NetD3_2: D3.2 R6.2 | length 215.7
  Bottom Layer w30: R6.2@9485,17702.99 D3.2@9485,17785 ; R6.2@9485,17732.4 cw(c9567.6,17732.4) D3.2@9509.19,17790.81 ; 9485,17740.7 ccw(c9518.77,17740.7) R6.2@9494.89,17716.82 ; 9491.19,17755.51 ccw(c9543.23,17741.57) R6.2@9496.57,17714.63
NetD4_2: D4.2 R7.2 | length 215.7
  Bottom Layer w30: R7.2@9785,17702.99 D4.2@9785,17785 ; R7.2@9785,17732.4 cw(c9867.6,17732.4) D4.2@9809.19,17790.81 ; 9785,17740.7 ccw(c9818.77,17740.7) R7.2@9794.89,17716.82 ; 9791.19,17755.51 ccw(c9843.23,17741.57) R7.2@9796.57,17714.63
NetD5_2: D5.2 R8.2 | length 215.7
  Bottom Layer w30: R8.2@10085,17702.99 D5.2@10085,17785 ; R8.2@10085,17732.4 cw(c10167.6,17732.4) D5.2@10109.19,17790.81 ; 10085,17740.7 ccw(c10118.77,17740.7) R8.2@10094.89,17716.82 ; 10091.19,17755.51 ccw(c10143.23,17741.57) R8.2@10096.57,17714.63
NetD6_2: D6.2 R9.2 | length 215.7
  Bottom Layer w30: R9.2@10385,17702.99 D6.2@10385,17785 ; R9.2@10385,17732.4 cw(c10467.6,17732.4) D6.2@10409.19,17790.81 ; 10385,17740.7 ccw(c10418.77,17740.7) R9.2@10394.89,17716.82 ; 10391.19,17755.51 ccw(c10443.23,17741.57) R9.2@10396.57,17714.63
NetD7_2: D7.2 R10.2 | length 215.7
  Bottom Layer w30: R10.2@10685,17702.99 D7.2@10685,17785 ; R10.2@10685,17732.4 cw(c10767.6,17732.4) D7.2@10709.19,17790.81 ; 10685,17740.7 ccw(c10718.77,17740.7) R10.2@10694.89,17716.82 ; 10691.19,17755.51 ccw(c10743.23,17741.57) R10.2@10696.57,17714.63
NetD8_2: D8.2 R11.2 | length 215.7
  Bottom Layer w30: R11.2@10985,17702.99 D8.2@10985,17785 ; R11.2@10985,17732.4 cw(c11067.6,17732.4) D8.2@11009.19,17790.81 ; 10985,17740.7 ccw(c11018.77,17740.7) R11.2@10994.89,17716.82 ; 10991.19,17755.51 ccw(c11043.23,17741.57) R11.2@10996.57,17714.63
NetD9_2: D9.2 R19.2 | length 215.7
  Bottom Layer w30: R19.2@11285,17702.99 D9.2@11285,17785 ; R19.2@11285,17732.4 cw(c11367.6,17732.4) D9.2@11309.19,17790.81 ; 11285,17740.7 ccw(c11318.77,17740.7) R19.2@11294.89,17716.82 ; 11291.19,17755.51 ccw(c11343.23,17741.57) R19.2@11296.57,17714.63
NetD10_2: D10.2 R12.2 | length 215.7
  Bottom Layer w30: R12.2@11585,17702.99 D10.2@11585,17785 ; R12.2@11585,17732.4 cw(c11667.6,17732.4) D10.2@11609.19,17790.81 ; 11585,17740.7 ccw(c11618.77,17740.7) R12.2@11594.89,17716.82 ; 11591.19,17755.51 ccw(c11643.23,17741.57) R12.2@11596.57,17714.63
NetD11_2: D11.2 R13.2 | length 215.7
  Bottom Layer w30: R13.2@11885,17702.99 D11.2@11885,17785 ; R13.2@11885,17732.4 cw(c11967.6,17732.4) D11.2@11909.19,17790.81 ; 11885,17740.7 ccw(c11918.77,17740.7) R13.2@11894.89,17716.82 ; 11891.19,17755.51 ccw(c11943.23,17741.57) R13.2@11896.57,17714.63
NetD12_2: D12.2 R14.2 | length 215.7
  Bottom Layer w30: R14.2@12185,17702.99 D12.2@12185,17785 ; R14.2@12185,17732.4 cw(c12267.6,17732.4) D12.2@12209.19,17790.81 ; 12185,17740.7 ccw(c12218.77,17740.7) R14.2@12194.89,17716.82 ; 12191.19,17755.51 ccw(c12243.23,17741.57) R14.2@12196.57,17714.63
NetD13_2: D13.2 R15.2 | length 215.7
  Bottom Layer w30: R15.2@12485,17702.99 D13.2@12485,17785 ; R15.2@12485,17732.4 cw(c12567.6,17732.4) D13.2@12509.19,17790.81 ; 12485,17740.7 ccw(c12518.77,17740.7) R15.2@12494.89,17716.82 ; 12491.19,17755.51 ccw(c12543.23,17741.57) R15.2@12496.57,17714.63
NetD14_2: D14.2 R16.2 | length 215.7
  Bottom Layer w30: R16.2@12785,17702.99 D14.2@12785,17785 ; R16.2@12785,17732.4 cw(c12867.6,17732.4) D14.2@12809.19,17790.81 ; 12785,17740.7 ccw(c12818.77,17740.7) R16.2@12794.89,17716.82 ; 12791.19,17755.51 ccw(c12843.23,17741.57) R16.2@12796.57,17714.63
NetD15_2: D15.2 R17.2 | length 215.7
  Bottom Layer w30: R17.2@13085,17702.99 D15.2@13085,17785 ; R17.2@13085,17732.4 cw(c13167.6,17732.4) D15.2@13109.19,17790.81 ; 13085,17740.7 ccw(c13118.77,17740.7) R17.2@13094.89,17716.82 ; 13091.19,17755.51 ccw(c13143.23,17741.57) R17.2@13096.57,17714.63
NetD16_2: D16.2 R18.2 | length 215.7
  Bottom Layer w30: R18.2@13385,17702.99 D16.2@13385,17785 ; R18.2@13385,17732.4 cw(c13467.6,17732.4) D16.2@13409.19,17790.81 ; 13385,17740.7 ccw(c13418.77,17740.7) R18.2@13394.89,17716.82 ; 13391.19,17755.51 ccw(c13443.23,17741.57) R18.2@13396.57,17714.63